# Altium PCB RS485.PcbDoc
Units mil, origin at the board's own origin, x right, y up, seen from the top; angles counter-clockwise.
Board outline 4280.03 x 808.03 mil, 2 copper layers (Top Layer, Bottom Layer); 48 components, 26 nets, 128 pads, 57 vias.
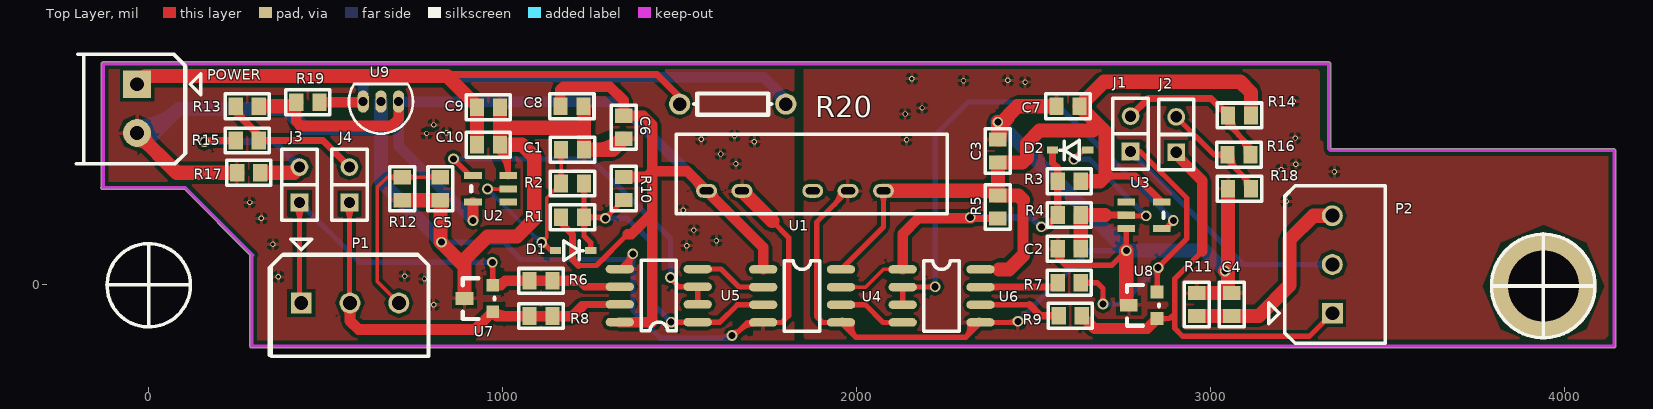
[diagram p0: Top Layer view]
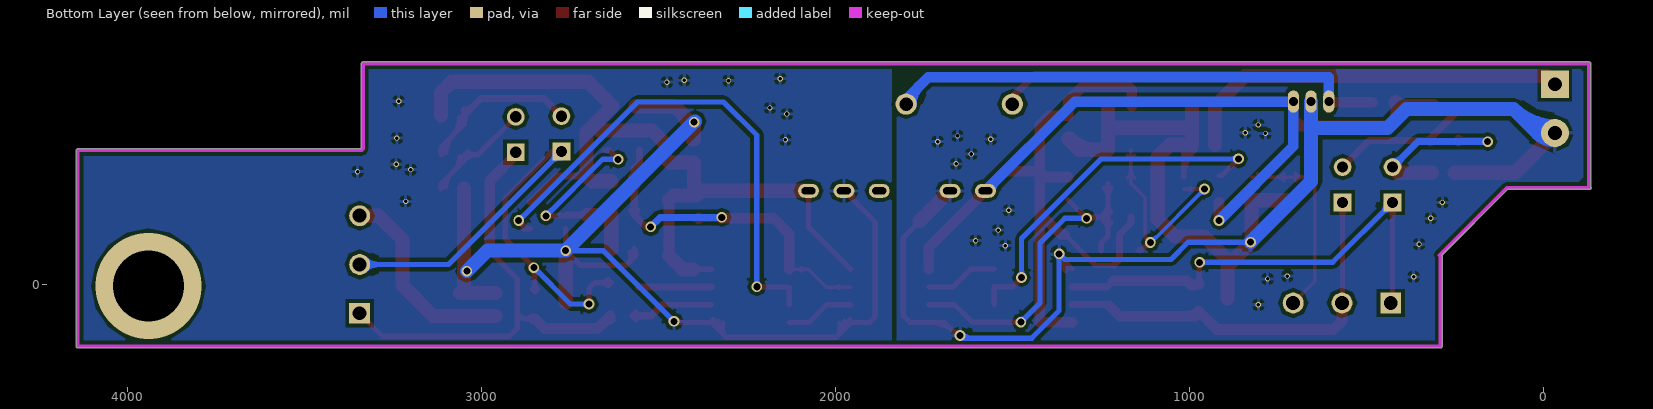
[diagram p1: Bottom Layer view, seen from below]

## Layer stack, top to bottom
Top Layer: signal copper 1.4
Dielectric: dielectric 12.6, FR-4, Dk 4.8
Bottom Layer: signal copper 1.4

## Board outline
286.98,-174 286.98,80 cw(c292,80) 287.95,82.96 101.92,268.98 -129,268.98 cw(c-129,274) -133.02,277.01 -133.02,624 cw(c-128,624) -128,629.02 3335,629.02 cw(c3335,624) 3340.01,624 3340.01,386.08 3342.08,384.02 4140,384.02 cw(c4140,379) 4143.56,382.53 4143.55,382.55 4144.55,381.55 4144.53,381.56 cw(c4141,378) 4146.01,378 4146.01,-174 cw(c4141,-174) 4141,-179.02 292,-179.02 cw(c292,-174)

## Design rules (kind name [scope] priority, off if disabled: settings)
Clearance Clearance_1 [All] p1: gap=10
PolygonConnect [All] p1: connectstyle=Relief reliefconductorwidth=10 reliefentries=4 polygonreliefangle="90 Angle" airgapwidth=10
RoutingTopology [All] p1: topology=Horizontal
RoutingVias [All] p1: holewidth=10 width=15 viastyle="Through Hole" minholewidth=5 minwidth=10 maxholewidth=20 maxwidth=30
SolderMaskExpansion [All] p1: expansion=4
Width [All] p1: maxlimit=50 minlimit=10 preferedwidth=15 minimp=50.000000 maximp=50.000000 favimp=50.000000
27 further rules are at their usual default settings.

## Components (designator, comment, footprint, x,y, rotation, side; value= is the part's Value field where it differs from the comment)
C1 "100pF" CC0603 1231,381 r180 top
C2 "100pF" CC0603 2569.25,100.98 r0 top
C3 "0.1uF" CC0603 2400,345 r90 top
C4 "4700pF" CC0603 3061,-23.51 r270 top
C5 "4700pF" CC0603 825,238.49 r90 top
C6 "Cap" CC0603 1343,477 r270 top
C7 "0.1uF" CC0603 2631,504 r180 top
C8 "0.1uF" CC0603 1164,504 r0 top
C9 "4.7uF" CC0603 928,501 r0 top
C10 "0.1uF" CC0603 928,395 r0 top
D1 "DIODE" SOD323 1150,96 r0 top
D2 "DIODE" SOD323 2654,380 r180 top
J1 "JUMPER" SIP2-2.54MM 2775,376 r90 top
J2 "JUMPER" SIP2-2.54MM 2904,374 r90 top
J3 "JUMPER" SIP2-2.54MM 427,232 r90 top
J4 "JUMPER" SIP2-2.54MM 568,232 r90 top
P1 "MHDR1X3" HEADER_35MM 432,-52 r90 top
P2 "MHDR1X3" HEADER_35MM 3345,-81 r180 top
POWER "MHDR1X2" HEADER_35MM_2 -32,566 r270 top
R1 "10K" CC0603 1231,190.2 r180 top
R2 "10K" CC0603 1231,285.6 r180 top
R3 "10K" CC0603 2569.25,291.95 r0 top
R4 "10K" CC0603 2569.25,196.46 r0 top
R5 "10K" CC0603 2400,187 r90 top
R6 "10" CC0603 1077,10.49 r0 top
R7 "10" CC0603 2634.25,5.49 r180 top
R8 "10" CC0603 1077,-89 r0 top
R9 "10" CC0603 2637,-88 r180 top
R10 "10K" CC0603 1343,239 r90 top
R11 "1M" CC0603 2962,-88.51 r90 top
R12 "1M" CC0603 717,303.49 r270 top
R13 "590" CC0603 247,504 r0 top
R14 "590" CC0603 3050,478 r0 top
R15 "133" CC0603 247,407 r0 top
R16 "133" CC0603 3049,367 r0 top
R17 "590" CC0603 251,316 r0 top
R18 "590" CC0603 3050,271 r0 top
R19 "0" CC0603 418,515 r0 top
R20 "100-W" AXIAL-0.3 1801,510 r180 top
U1 "A0505S-1WR2" A0505S-1W-2R 1577,265 r0 top
U2 "74HC1G14" SOT-23-5 1017,233 r270 top
U3 "74HC1G14" SOT-23-5 2763,233 r90 top
U4 "ADUM1201ARZ" SO-8 1737,43 r0 top
U5 "MAX3485" SO-8 1552,-106 r180 top
U6 "MAX3485" SO-8 2131,43 r0 top
U7 "SM712" SOT-23W 973,-77 r90 top
U8 "SM712" SOT-23W 2850,-96 r90 top
U9 "78L05" TO-92 707,517 r180 top

## Footprints (in the part's own frame and the unit in brackets; to place one, negate y for a bottom-side part, rotate by r counter-clockwise, add the part's x,y. Pads: shape width x height; smd on the part's side, far side on the other; paste and mask are expansions set on the pad)
A0505S-1W-2R [mm]
  oval 1.5x1 hole 0.5 slot 1 at 0 deg: 1(0,0) 2(2.54,0) 4(7.62,0) 5(10.16,0) 6(12.7,0)
  silkscreen extent -2.16,-1.65 17.27,4.06
AXIAL-0.3 [mil] "Resistor"
  round 60 hole 38: 1(0,0) 2(300,0)
  silkscreen extent 41,-30 259,30
CC0603 [mil]
  rect 40x50 smd: 1(0,0) 2(65,0)
  silkscreen extent -30,-35 95,35
HEADER_35MM [mm]
  rect 1.5x1.5 hole 1: 1(0,0)
  round 1.5 hole 1: 2(0,-3.5) 3(0,-7)
  silkscreen extent -3.81,-9.14 4.57,2.16
HEADER_35MM_2 [mm]
  rect 2x2 hole 1: 1(0,0)
  round 2 hole 1: 2(3.5,0)
  silkscreen extent -2.16,-3.81 5.72,4.57
SIP2-2.54MM [mil]
  rect 50x50 hole 32: 1(0,0)
  round 50 hole 32: 2(100,0)
  silkscreen extent -50,-50 150,50
SO-8 [mil] "SO8"
  oval 80x24 smd: 1(0,0) 2(0,-50) 3(0,-100) 4(0,-150) 5(220,-150) 6(220,-100) 7(220,-50) 8(220,0)
  silkscreen extent 60,-175 160,25
SOD323 [mm]
  rect 0.8x0.5 smd: 1(0,0) 2(2.54,0)
  silkscreen extent 0.61,-0.7 2.01,0.7
SOT-23-5 [mil] "SOT23-5"
  rect 20x50 smd: 1(0,0) 2(-37,0) 3(-75,0) 4(-75,-100) 5(0,-100)
  silkscreen extent -45,-105 -30,-105
SOT-23W [mil]
  rect 35.98x35.98 smd: 1(0,0) 2(75,0)
  rect 35.98x50 smd: 3(37.99,80)
  silkscreen extent -20,-5 95,85
TO-92 [mm]
  oval 0.8x1.6 hole 0.65: 1(0,0) 2(1.27,0) 3(2.54,0)
  silkscreen extent -1.03,-1.26 3.57,2.3

## Part data
C1 C2 C3 C4 C5 C7 C8 C9 C10: library part Cap, "Capacitor"
C6: "Capacitor"
P1 P2: "Header, 3-Pin"
POWER: "Header, 2-Pin"
R1 R2 R3 R4 R5 R6 R7 R8 R9 R10 R11 R12 R13 R14 R15 R16 R17 R18 R19 R20: library part Res2, "Resistor"
U9: "CI-78L05"

## Via types
v1: diameter 15, hole 10, Top Layer to Bottom Layer, 32 vias
v2: diameter 30, hole 20, Top Layer to Bottom Layer, 24 vias
v3: diameter 300, hole 200, Top Layer to Bottom Layer, 1 vias

## Nets (pads, with @x,y where several pads share a name; then routed paths per layer and width w, separated by ;. In a path a pad name is that pad's centre, name@x,y a point inside that pad or via, vN(x,y) a via of type N, cw(c..) or ccw(c..) an arc to the next point about the centre after c; other vN are vias at no path point)
+5V: C6.1 C8.1 R1.2 R10.2 R13.2 R19.1 U1.1 U2.5 U4.1 U5.8 U9.1 | length 4055.4
  Top Layer w15: 1215,54 1266,54 1354.5,142.5
  Top Layer w20: R1.2 1166,174 1198,142 1198,71 1215,54
  Top Layer w30: R19.1 418,461 431,448 686,448 707,469 U9.1 ; v2(917,181) U2.5 ; C8.1 1164,551 1172,559 1304,559 1343,520 C6.1 1398,477 1424,451 1424,320 ; U5.8 1424,-106 1424,202 ; R10.2 1408,304 1424,320 ; 1354.5,142.5 1364.5,142.5 1424,202 ; 1552.2,289.8 cw(c1527.4,265) U1.1@1562.47,265 ; U1.1@1591.53,265 ccw(c1626.6,265) 1601.8,240.2 ; U4.1 1737,105 U1.1 1522,320 1424,320 ; 1424,202 1424,320
  Top Layer w40: R13.2 407,504 R19.1
  Bottom Layer w30: v2(917,181) 707,391 U9.1 1325,517 U1.1 ; 1552.2,289.8 cw(c1527.4,265) U1.1@1562.47,265
+5V_1: C3.1 C7.1 R3.2 R5.2 R14.2 U1.6 U3.5 U4.8 U6.8 | length 2552.5
  Top Layer w15: U4.8 2077,163 U1.6 ; U1.6@2068.38,256.38 cw(c2047.58,235.58) 2077,235.58 cw(c2106.42,235.58) U1.6@2085.62,256.38 ; U6.8 2403,43
  Top Layer w20: 2704,307 2789,307 U3.5
  Top Layer w30: 2471,82 2471,239
  Top Layer w40: U1.6 2387,265 2400,278 C3.1 2469,345 2482,358 2482,399 2518,435 2668,435 2684,451 ; 2363.62,265 cw(c2363.62,220.62) R5.2@2395,252 ; R5.2 2458,252 2471,239 ; 2403,43 2432,43 2471,82 ; R3.2 2688.95,291.95 2704,307 2704,431 2684,451 ; R14.2 3115,543 3085,573 2700,573 C7.1 2684,451
\R\E\: U2.4 U5.2 U5.3 | length 1142.8
  Top Layer w15: v2@862,347.5 cw(c862,329.39) 874.8,342.2 cw(c887.61,355) v2@869.5,355 ; v2(862,355) 909,308 U2.4 ; v2@1475,12.5 cw(c1475,-3.19) 1486.1,7.9 ; v2(1475,20) 1475,19 1500,-6 U5.3 U5.2 ; v2@1482.5,20 ccw(c1503.02,20) 1488.51,5.49
  Bottom Layer w15: v2(862,355) 1250,355 1475,130 v2(1475,20) ; v2@867.3,349.7 cw(c880.11,336.89) 880.11,355 cw(c880.11,373.11) v2@867.3,360.3 ; v2@1469.7,25.3 ccw(c1456.89,38.11) 1475,38.11 ccw(c1493.11,38.11) v2@1480.3,25.3
\R\E\1: U3.4 U6.2 U6.3 | length 1614
  Top Layer w15: U6.3 U6.2 2222,-7 v2(2223,-6) ; 2202.48,-7 ccw(c2202.48,14.52) v2@2217.7,-0.7 ; 2207.31,-7 cw(c2207.31,-21.69) v2@2217.7,-11.3 ; U3.4 2873,158 v2(2896,181) ; U3.4@2880.04,160.82 cw(c2903.39,147.34) v2@2897.61,173.67 ; U3.4@2880.5,158 cw(c2898.61,158) v2@2885.8,170.8 ; v2@2888.5,181 cw(c2870.39,181) 2883.2,168.2 cw(c2896,155.39) v2@2896,173.5
  Bottom Layer w15: v2@2217.7,-0.7 ccw(c2204.89,12.11) 2223,12.11 ccw(c2241.11,12.11) v2@2228.3,-0.7 ; v2(2223,-6) 2223,422 2317,516 2560.25,516 2895.25,181 v2(2896,181) ; 2881.92,194.33 ccw(c2896,208.41) v2@2896,188.5 ; 2883.73,192.53 cw(c2872.2,181) v2@2888.5,181
A1: J3.1 P1.1 R6.1 R6.2 U5.6 U7.2 | length 1638.8
  Top Layer w15: J3.1@414.63,219.63 cw(c384.75,189.75) 427,189.75 cw(c469.25,189.75) J3.1@439.37,219.63 ; J3.1 427,-47 P1.1 ; U7.2@965.58,5.42 ccw(c947.67,23.33) 973,23.33 ccw(c998.33,23.33) U7.2@980.42,5.42 ; v2@966.7,57.7 cw(c951.48,42.48) 973,42.48 ; v2(972,63) 973,62 U7.2 996,-2 ; 973,47.31 cw(c987.69,47.31) v2@977.3,57.7 ; U7.2@980.92,-8.88 cw(c996,-21.96) 996,-2 ; U7.2@980.92,4.88 ccw(c996,17.96) 996,-2
  Top Layer w20: 1215.51,10.49 1232,-6 U5.6
  Top Layer w30: U7.2@973.73,0.9 ccw(c982.67,36.31) 1008.49,10.49 ; 996,-2 1008.49,10.49 ; 1215.51,10.49 R6.2 R6.1 1008.49,10.49
  Bottom Layer w15: J3.1@427,214.5 cw(c427,172.25) 456.87,202.13 cw(c486.75,232) J3.1@444.5,232 ; J3.1 596,63 v2(972,63) ; v2@966.7,57.7 ccw(c953.89,44.89) 953.89,63 ccw(c953.89,81.11) v2@966.7,68.3
A2: J2.1 P2.1 R9.1 U8.1 | length 1395.6
  Top Layer w15: U8.1 2885,-96 2900,-81 ; U8.1@2857.42,-103.42 cw(c2875.33,-121.33) 2875.33,-96 cw(c2875.33,-70.67) U8.1@2857.42,-88.58 ; 2977,94 2900,17 2900,-81 ; P2.1 3280,-146 2922,-146 2900,-124 2900,-81
  Top Layer w30: R9.1@2637,-98 cw(c2637,-122.14) R9.1@2654.07,-105.07 ; R9.1 2673,-124 2822,-124 U8.1 ; J2.1 2904,367 2977,294 2977,94
B1: J4.1 P1.2 R8.1 R8.2 U5.7 U7.1 | length 1306.4
  Top Layer w15: J4.1@555.63,219.63 cw(c525.75,189.75) 568,189.75 cw(c610.25,189.75) J4.1@580.37,219.63 ; J4.1 568,-50.2 P1.2
  Top Layer w20: 1226,-61 1231,-56 U5.7
  Top Layer w30: P1.2@559.52,-62.27 cw(c534.72,-87.07) 569.8,-87.07 cw(c604.87,-87.07) P1.2@580.07,-62.27 ; P1.2 569.8,-102.8 594,-127 923,-127 U7.1 985,-89 R8.1 R8.2 1198,-89 1226,-61 ; U7.1@975.12,-74.88 ccw(c1009.19,-40.81) 1009.19,-89
B2: J1.1 P2.2 R7.1 U8.2 | length 1929.8
  Top Layer w15: R7.1 2680.51,5.49 2697,-11 v2(2697,-55) ; R7.1@2643.09,-3.35 cw(c2664.43,-24.69) 2664.43,5.49 cw(c2664.43,35.67) R7.1@2643.09,14.33 ; v2@2691.7,-49.7 ccw(c2678.89,-36.89) 2697,-36.89 ccw(c2715.11,-36.89) v2@2702.3,-49.7 ; J1.1 2802,376 ; J1.1@2790.97,368.85 cw(c2802,363.92) 2802,376 ; J1.1@2790.97,383.15 ccw(c2802,388.08) 2802,376 ; U8.2@2842.58,-13.58 ccw(c2824.67,4.33) 2850,4.33 ccw(c2875.33,4.33) U8.2@2857.42,-13.58 ; U8.2 2850,46 v2@2852,48 ; 2850,22.65 cw(c2878.35,22.65) v2@2858.3,42.7 ; v2(2853,48) v2@2852,48 ; v2@2853,55.5 ccw(c2853,71.19) 2864.1,60.1 ; v2@2860.5,48 cw(c2881.02,48) 2866.51,62.51 ; 2802,376 2934,244 2934,130 v2@2852,48
  Bottom Layer w15: v2(2697,-55) 2750,-55 v2(2853,48) ; v2@2702.3,-60.3 cw(c2715.11,-73.11) 2715.11,-55 cw(c2715.11,-36.89) v2@2702.3,-49.7 ; J1.1@2775,358.5 cw(c2775,316.25) 2804.87,346.13 cw(c2834.75,376) J1.1@2792.5,376 ; J1.1 3094.2,56.8 P2.2 ; v2@2845.5,48 cw(c2827.39,48) 2840.2,35.2 cw(c2853,22.39) v2@2853,40.5 ; P2.2@3329.42,41.22 ccw(c3291.82,3.62) 3291.82,56.8 ccw(c3291.82,109.98) P2.2@3329.42,72.37
GND: C1.1 C5.1 C6.2 C8.2 C9.2 C10.2 POWER.2 R12.2 R17.1 U1.2 U2.3 U4.4 U5.5 U7.3 U9.2 | length 5806.9
  Top Layer w15: C10.2@984.36,380.97 cw(c911.26,304.57) U2.3@1017,304.57 ; C10.2 1017,371 ; C10.2@994.73,391.81 cw(c944.85,339.68) 1017,339.68 ; C10.2@995.3,377.71 cw(c999.79,353.79) 1017,371 ; C10.2@1005.1,402.64 cw(c978.44,374.79) 1017,374.79 ; C10.2@1005.5,390 ccw(c1023.61,390) C10.2@1010.8,377.2 ; U2.3 1017,371 ; U5.5 v2@1369,81 ; U5.5@1350.77,38.99 cw(c1371.4,50.2) 1354.8,66.8 ; 1351.95,63.95 ccw(c1328.91,87) v2@1361.5,87 ; 1362.25,69.31 ccw(c1349.79,76.51) v2@1362.42,83.4 ; U5.5@1363.95,46.15 cw(c1389.8,60.2) v2@1369,81 ; v2(1369,87) v2@1369,81 ; v2(1649,-144) 1651,-146 1654,-146 1693,-107 U4.4 1790,-107 1809,-88 1809,133 1762.5,179.5 ; v2@1649,-136.5 ccw(c1649,-101.49) 1673.75,-126.25 ; 1674,-126 cw(c1709,-160.99) U4.4@1709,-111.5
  Top Layer w40: POWER.2@-32,408.83 cw(c-32,362.07) 1.07,395.14 cw(c34.13,428.2) POWER.2@-12.63,428.2 ; POWER.2 80.2,316 R17.1 ; R12.2 C5.1 v2@825,120 ; v2(828,120) v2@825,120 ; U7.3 893,52 ; C9.2 993,442 ; C8.2@1231,502 1231,443 ; 1263.16,381 ccw(c1263.16,486.84) C6.2@1338,412 ; C6.2 1312,381 C1.1 1231,443 ; U1.2 1762.5,179.5 ; v2@825,120 893,52 ; 893,52 893,71 958,136 1041,136 1090,185 1090,361 1056,395 C10.2 993,442 ; 993,442 994,443 1231,443
  Bottom Layer w15: v2(828,120) 1004,120 1053,71 1353,71 v2(1369,87) 1369,-74 1446.5,-151.5 1641.5,-151.5 v2(1649,-144) ; v2@833.3,114.7 cw(c846.11,101.89) 846.11,120 cw(c846.11,138.11) v2@833.3,125.3 ; v2@1361.5,87 cw(c1343.39,87) 1356.2,74.2 cw(c1369,61.39) v2@1369,79.5 ; v2@1363.7,81.7 cw(c1350.89,68.89) 1369,68.89 cw(c1387.11,68.89) v2@1374.3,81.7 ; 1612.79,-151.5 ccw(c1612.79,-107.79) v2@1643.7,-138.7
  Bottom Layer w40: POWER.2@-32.01,407.57 ccw(c-31.97,476.5) 16.76,427.76 ; POWER.2 17.2,428.2 85,496 ; POWER.2@-31.99,447.57 ccw(c-31.9,612.89) 84.99,495.99 ; POWER.2@-18.3,414.51 cw(c14.76,381.44) 14.76,428.2 cw(c14.76,474.97) POWER.2@-18.3,441.9 ; U9.2 657,442 ; v2(828,120) 657,291 657,442 ; 85,496 387,496 441,442 657,442
  other v1: 806,-57 780,16 367,22 724,24 1521,110 352,114 1605,124 1541,154 319,187 1511,210 286,232 1660,341 1617,369 1712,404 1562,411 1656,420 786,427 843,429 806,451
GND1: C2.1 C3.2 C4.1 C7.2 R11.2 R18.1 U1.5 U3.3 U4.5 U6.5 U8.3 | length 3873.1
  Top Layer w15: 1939.4,227.4 ccw(c1901.79,265) U1.5@1954.97,265 ; U4.5@1960.76,-99.09 ccw(c1975.09,-103.77) U4.5@1964.43,-114.43 ; U4.5@1975.02,-103.74 ccw(c2001.16,-112.27) 1981.71,-131.72 ; U1.5 1888,176 1888,-90 1905,-107 U4.5 1999,-149 ; U4.5@1989.28,-108.4 ccw(c2027.22,-120.78) 1999,-149 ; U6.5@2318.72,-108.4 cw(c2280.78,-120.78) 2309,-149 ; 2326.29,-131.72 ccw(c2306.84,-112.27) U6.5@2332.98,-103.74 ; U6.5@2343.57,-114.43 ccw(c2332.91,-103.77) U6.5@2347.24,-99.09 ; 2431.65,-107 ccw(c2431.65,-78.65) v2@2451.7,-98.7 ; v2(2457,-104) 2454,-107 U6.5 2309,-149 ; C2.1@2563.66,84.8 cw(c2559.14,75.75) 2569.25,75.75 ; C2.1@2566.88,96.75 ccw(c2589.73,89.28) 2572.73,72.27 ; C2.1 2569.25,75.75 ; C2.1@2574.84,84.8 ccw(c2579.37,75.75) 2569.25,75.75 ; C2.1@2581.13,92.09 ccw(c2615.76,80.76) 2590,55 ; v2@2755.5,96 cw(c2737.39,96) 2750.2,83.2 cw(c2763,70.39) v2@2763,88.5 ; v2@2757.7,101.3 ccw(c2744.89,114.11) 2763,114.11 ccw(c2781.11,114.11) v2@2768.3,101.3 ; U3.3 v2(2763,96) 2722,55 2590,55 ; 1999,-149 2309,-149 ; 2569.25,75.75 2590,55
  Top Layer w40: C3.2 v2@2400,448 ; v2(2400,459) v2@2400,448 ; v2@2400.99,454.1 ccw(c2392.61,495.72) 2427.97,472.21 ; C3.2@2405,410 cw(c2508.81,410) 2435.41,483.41 ; C7.2 2456,504 v2@2400,448 ; U8.3@2763,-51.01 v2(2763,96) ; R11.2 C4.1 3050,-12.51 v2@3050,38 ; v2(3042,38) v2@3050,38 ; R18.1 v2@3050,38
  Bottom Layer w15: v2(2457,-104) 2657,96 v2(2763,96) ; v2@2457,-96.5 ccw(c2457,-78.39) 2469.8,-91.2 ccw(c2482.61,-104) v2@2464.5,-104 ; v2@2757.7,90.7 ccw(c2744.89,77.89) 2744.89,96 ccw(c2744.89,114.11) v2@2757.7,101.3
  Bottom Layer w40: v2@2398,461 v2(2400,459) v2(2763,96) 2984,96 v2(3042,38)
  other v1: 3215,235 3351,319 3201,325 3242,340 2142,409 3240,414 2138,482 2186,499 3235,518 2477,572 2303,576 2428,577 2157,582
NetC1_2: C1.2 D1.1 R2.2 U2.2 | length 1003.6
  Top Layer w10: v2(958,270) U2.2 ; v2@965.07,262.93 cw(c982.14,245.86) 982.14,270 cw(c982.14,294.14) v2@965.07,277.07 ; U2.2@998.46,266.46 ccw(c989.93,257.93) 989.93,270 ccw(c989.93,282.07) U2.2@998.46,273.54 ; v2@1111,109 cw(c1111,84.86) 1128.07,101.93 cw(c1145.14,119) v2@1121,119 ; v2@1111.96,128.95 ccw(c1113.63,146.37) 1126,134 ; v2@1113.59,109.34 cw(c1117.38,95.19) 1124.71,107.88 ; v2@1118.6,111.4 ccw(c1144.09,136.9) D1.1@1144.09,100.84 ; v2@1120.67,121.54 ccw(c1152.72,129.96) D1.1@1136.15,101.27 ; v2@1120.95,119.96 cw(c1138.37,121.63) 1126,134 ; D1.1@1140.32,92.97 ccw(c1134,87.9) 1134,96 ; D1.1@1140.32,99.03 cw(c1134,104.1) 1134,96 ; D1.1 1134,96 ; R2.2@1155.39,301.21 ccw(c1129.79,326.81) 1166,326.81 ccw(c1202.21,326.81) R2.2@1176.61,301.21 ; C1.2@1155.39,365.39 cw(c1129.79,339.79) 1166,339.79 cw(c1202.21,339.79) C1.2@1176.61,365.39 ; C1.2 R2.2 1126,245.6 1126,134 ; 1126,134 v2(1111,119) 1134,96
  Bottom Layer w10: v2@958,260 cw(c958,235.86) 975.07,252.93 cw(c992.14,270) v2@968,270 ; v2(958,270) 1109,119 v2(1111,119) ; 1090.51,137.49 ccw(c1111,157.97) v2@1111,129 ; 1095.34,132.66 cw(c1081.69,119) v2@1101,119
NetC2_2: C2.2 D2.1 R4.2 U3.2 | length 742.4
  Top Layer w15: v2(2615,354) 2641,380 D2.1 ; v2@2615,361.5 ccw(c2615,379.61) 2627.8,366.8 ccw(c2640.61,354) v2@2622.5,354 ; 2631.98,370.98 cw(c2648.09,354.87) D2.1@2648.09,377.66 ; U3.2 2765,194 v2(2819,194) ; U3.2@2779.77,197.77 ccw(c2788.86,206.86) 2788.86,194 ; v2@2813.7,188.7 ccw(c2800.89,175.89) 2800.89,194 ccw(c2800.89,212.11) v2@2813.7,199.3
  Top Layer w20: 2702.54,196.46 U3.2@2762.54,196.46
  Top Layer w40: C2.2 R4.2 2702.54,196.46
  Bottom Layer w15: v2(2615,354) 2659,354 v2(2819,194) ; v2@2620.3,348.7 cw(c2633.11,335.89) 2633.11,354 cw(c2633.11,372.11) v2@2620.3,359.3 ; v2@2811.5,194 ccw(c2793.39,194) 2806.2,206.8 ccw(c2819,219.61) v2@2819,201.5
NetC4_2: C4.2 P2.3 R11.1 | length 575.8
  Top Layer w40: R11.1 C4.2 3137.49,-88.51 3224,-2 3224,127 3291.59,194.59 P2.3
NetC5_2: C5.2 P1.3 R12.1 | length 714
  Top Layer w10: R12.1@701.39,292.88 ccw(c675.79,267.27) 675.79,303.49 ccw(c675.79,339.7) R12.1@701.39,314.09 ; P1.3 646,9.59 646,275 674.49,303.49 R12.1 C5.2 ; R12.1@732.61,292.88 cw(c758.21,267.27) 758.21,303.49 cw(c758.21,339.7) R12.1@732.61,314.09 ; C5.2@809.39,292.88 ccw(c783.79,267.27) 783.79,303.49 ccw(c783.79,339.7) C5.2@809.39,314.09
NetJ1_2: J1.2 R14.1 R16.2 | length 659.8
  Top Layer w15: R14.1@3047.5,473 ccw(c3089.75,473) 3059.87,443.13 ; R14.1 3050,453 3114,389 R16.2 ; R14.1@3062.5,473 ccw(c3140.96,473) 3085.48,417.52 ; 3080.64,422.36 cw(c3030.28,372) R16.2@3101.5,372 ; 3106.25,396.75 cw(c3081.49,372) R16.2@3116.5,372
  Top Layer w20: J1.2 2825,526 3002,526 R14.1 ; 3024.39,503.61 ccw(c3050,529.21) R14.1@3050,493
NetJ2_2: J2.2 R16.1 R18.2 | length 445.4
  Top Layer w15: J2.2 3011,367 R16.1 3049,351 3115,285 R18.2 ; R16.1@3040.16,358.16 ccw(c3018.82,336.82) 3018.82,367 ccw(c3018.82,397.18) R16.1@3040.16,375.84 ; R16.1@3061.5,362 ccw(c3118.23,362) 3078.12,321.88 ; 3087.3,312.7 cw(c3050.59,276) R18.2@3102.5,276
NetJ3_2: J3.2 R15.1 R17.2 | length 619
  Top Layer w20: v2(158,404) 161,407 R15.1 ; v2@161.54,400.46 cw(c177.31,384.69) 177.31,407 ; R15.1@239.93,399.93 ccw(c222.86,382.86) 222.86,407 ccw(c222.86,431.14) R15.1@239.93,414.07
  Top Layer w40: R17.2 411,316 J3.2
  Bottom Layer w20: v2(158,404) 355,404 J3.2 ; J3.2@412,332 ccw(c375.79,332) 401.39,357.61 ccw(c427,383.21) J3.2@427,347
NetJ4_2: J4.2 R13.1 R15.2 | length 490.6
  Top Layer w20: R13.1 247,487 312,422 R15.2 493,407 J4.2 ; R13.1@257,499 ccw(c310.11,499) 272.56,461.44 ; R15.2@319.07,399.93 cw(c336.14,382.86) 336.14,407 cw(c336.14,431.14) R15.2@319.07,414.07
NetR7_2: R7.2 U6.7 | length 205.8
  Top Layer w20: U6.7 R7.2@2556.76,-7
NetR9_2: R9.2 U6.6 | length 271.8
  Top Layer w15: U6.6 2490,-57
  Top Layer w20: 2490,-57 2521,-88 R9.2 ; R9.2@2564.93,-95.07 ccw(c2547.86,-112.14) 2547.86,-88 ccw(c2547.86,-63.86) R9.2@2564.93,-80.93
NetR19_2: R19.2 R20.1 U9.3 | length 1482.5
  Top Layer w30: R19.2 605,515 U9.3
  Bottom Layer w30: U9.3 607,586 1739,586 1801,524 R20.1 ; 1765.49,559.51 cw(c1715.99,510) R20.1@1786,510
NetU4_2: U4.2 U5.4 | length 206.1
  Top Layer w15: U5.4 1618,44 1669,-7 U4.2
NetU4_6: U4.6 U6.4 | length 194.7
  Top Layer w15: U4.6 2026,-57 2076,-107 U6.4
TX: D1.2 R1.1 R2.1 R10.1 U4.3 U5.1 | length 1336.1
  Top Layer w15: R1.1@1222.16,176.36 cw(c1200.82,155.02) 1231,155.02 cw(c1261.18,155.02) R1.1@1239.84,176.36 ; R1.1@1222.16,204.04 ccw(c1200.82,225.38) 1231,225.38 ccw(c1261.18,225.38) R1.1@1239.84,204.04 ; R2.1@1222.16,271.76 cw(c1200.82,250.42) 1231,250.42 cw(c1261.18,250.42) R2.1@1239.84,271.76 ; R2.1 R1.1 ; R1.1@1239.84,181.36 cw(c1261.18,160.02) 1261.18,190.2 cw(c1261.18,220.38) R1.1@1239.84,199.04 ; D1.2 1250,118 1231,137 R1.1 ; 1265.17,190.2 cw(c1265.17,161.17) v2@1285.7,181.7 ; v2@1287.8,190.2 R1.1 ; v2@1291,194.5 ccw(c1291,212.61) 1303.8,199.8 ccw(c1316.61,187) v2@1298.5,187 ; v2@1294.2,190.2 R10.1 ; v2(1477,-106) U5.1 1615,-106 1664,-57 U4.3 ; v2@1482.3,-111.3 cw(c1495.11,-124.11) 1495.11,-106 cw(c1495.11,-87.89) v2@1482.3,-100.7
  Bottom Layer w15: v2(1291,187) 1353,187 1423,117 1423,-52 v2(1477,-106) ; v2@1296.3,181.7 cw(c1309.11,168.89) 1309.11,187 cw(c1309.11,205.11) v2@1296.3,192.3 ; v2@1469.5,-106 ccw(c1451.39,-106) 1464.2,-93.2 ccw(c1477,-80.39) v2@1477,-98.5
TX1: D2.2 R3.1 R4.1 R5.1 U4.7 U6.1 | length 1270.6
  Top Layer w10: U4.7 2027,-7 2077,43 U6.1 ; U4.7@1989.95,-11.95 cw(c2001.9,-23.9) 2001.9,-7 cw(c2001.9,9.9) U4.7@1989.95,-2.05 ; U6.1@2098.05,38.05 ccw(c2086.1,26.1) 2086.1,43 ccw(c2086.1,59.9) U6.1@2098.05,47.95
  Top Layer w20: v2(2322,190) 2325,187 R5.1 ; v2@2325.54,193.54 ccw(c2341.31,209.31) 2341.31,187 ; R5.1@2387.93,179.93 ccw(c2370.86,162.86) 2370.86,187 ccw(c2370.86,211.14) R5.1@2387.93,194.07 ; v2(2523,163) 2535.79,163 R4.1 R3.1 2569.25,328.75 2554,344 D2.2 ; R4.1@2562.18,208.54 ccw(c2545.11,225.61) 2569.25,225.61 ccw(c2593.39,225.61) R4.1@2576.32,208.54 ; R3.1@2562.18,279.88 cw(c2545.11,262.81) 2569.25,262.81 cw(c2593.39,262.81) R3.1@2576.32,279.88 ; R3.1@2562.18,304.02 ccw(c2545.11,321.09) 2569.25,321.09 ccw(c2593.39,321.09) R3.1@2576.32,304.02
  Top Layer w30: U6.1 2131,143 2175,187 v2@2325,187
  Bottom Layer w20: v2(2322,190) 2496,190 v2(2523,163)
VCC: C9.1 C10.1 POWER.1 R20.2 | length 1815.9
  Top Layer w20: 844,589 849,594 1437,594 1501,530 R20.2
  Top Layer w40: POWER.1 -9,589 844,589 C9.1@928,505 ; C10.1 C9.1
pads on no net: U1.4 U2.1 U3.1
copper on no net:
  other v3: 3942,-4

## Polygon pours and split planes (outlines as drawn)
GND1 on Top Layer "Top Layer-No Net" (solid, pour order 5): 1851,604 1851,-149 1856,-154 4115,-154 4130,-139 4130,362 4118,374 3347,374 3310,411 3310,601 3279,632 1852,632 1851,633
GND on Top Layer "Top Layer-No Net" (solid, pour order 2): 1825,-161 1825,608 1812,621 -115,621 -126,610 -126,295 -120,289 -108,277 -88,277 103,277 176,204 292,88 292,-174 1825,-174 1825,-161
GND on Bottom Layer "Top Layer-No Net" (solid, pour order 9): 1827,-165 1827,591 1807,611 -102,611 -116,597 -116,307 -99,290 95,290 264,121 304,81 304,-94 304,-163 311,-170 1821,-170 1829,-162
GND1 on Bottom Layer "Top Layer-No Net" (solid, pour order 7): 1842,-158 1842,619 1840,621 3324,621 3329,616 3329,365 4127,365 4132,360 4132,-150 4117,-165 1843,-165 1837,-159

## Keep-outs
Keep-Out Layer:
  lines w10: -129,274 104,274 295,83 292,80 292,-174 4141,-174 4141,346 4141,378 4140,379 3340,379 3335,384 3335,624 -128,624 -128,275

## Silkscreen, mask and mechanical layers (free items; w line width, h text height)
Top Overlay:
  circle w10: c1,-2 r117.71
  circle w10: c3941,-4 r145.99
  lines w10: -204,341 76,341 106,371 106,616 71,651 -199,651 ; -118,-1 117,-1 ; 1,-119 1,115.71 ; 341,-200.05 341,46 381,86 761,86 791,56 791,-200.05 ; 3798,-4 4086,-4 ; 3941,-147 3941,-4 3941,144